# EAGLE board SparkFun_XBee_Serial_Explorer_Panel_v14 (EAGLE 7.5.0), part 1 of 2
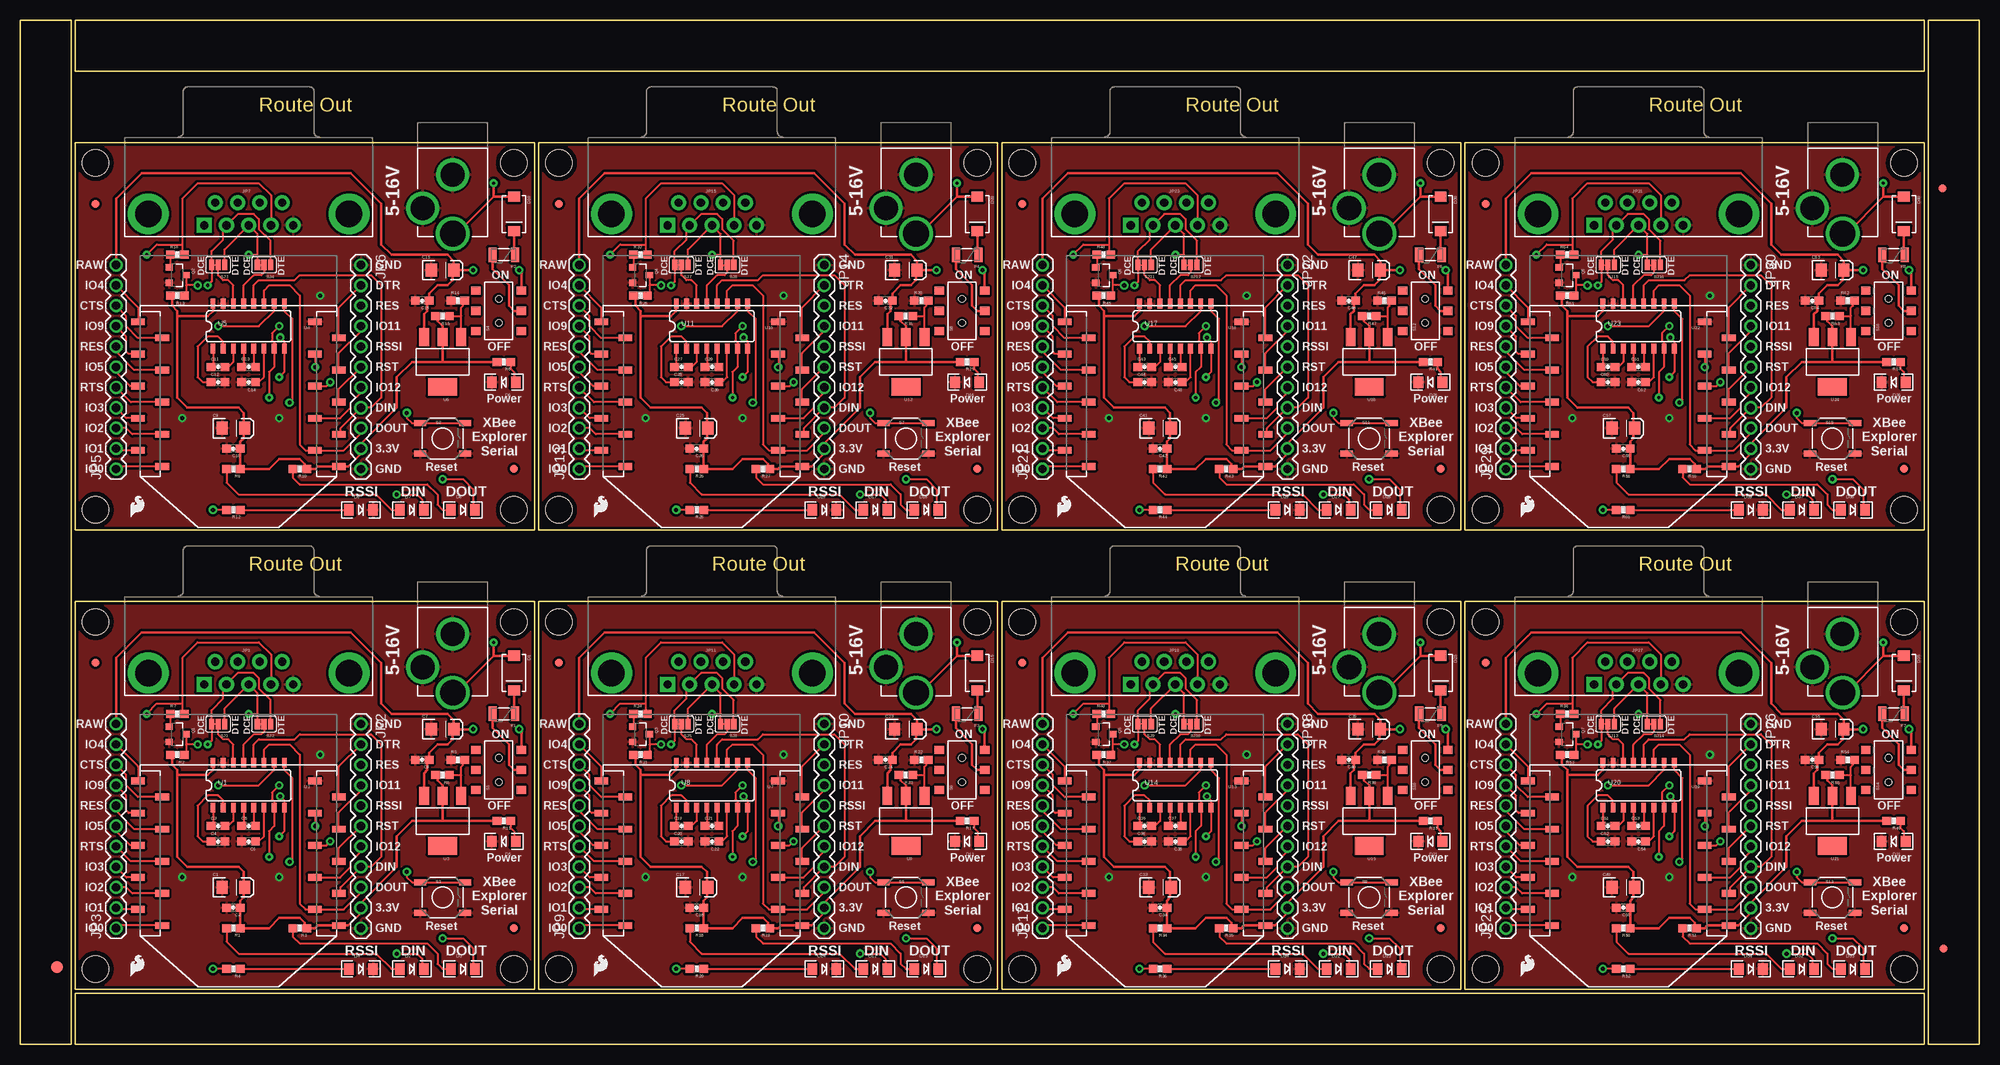
[diagram p0: board, top side]
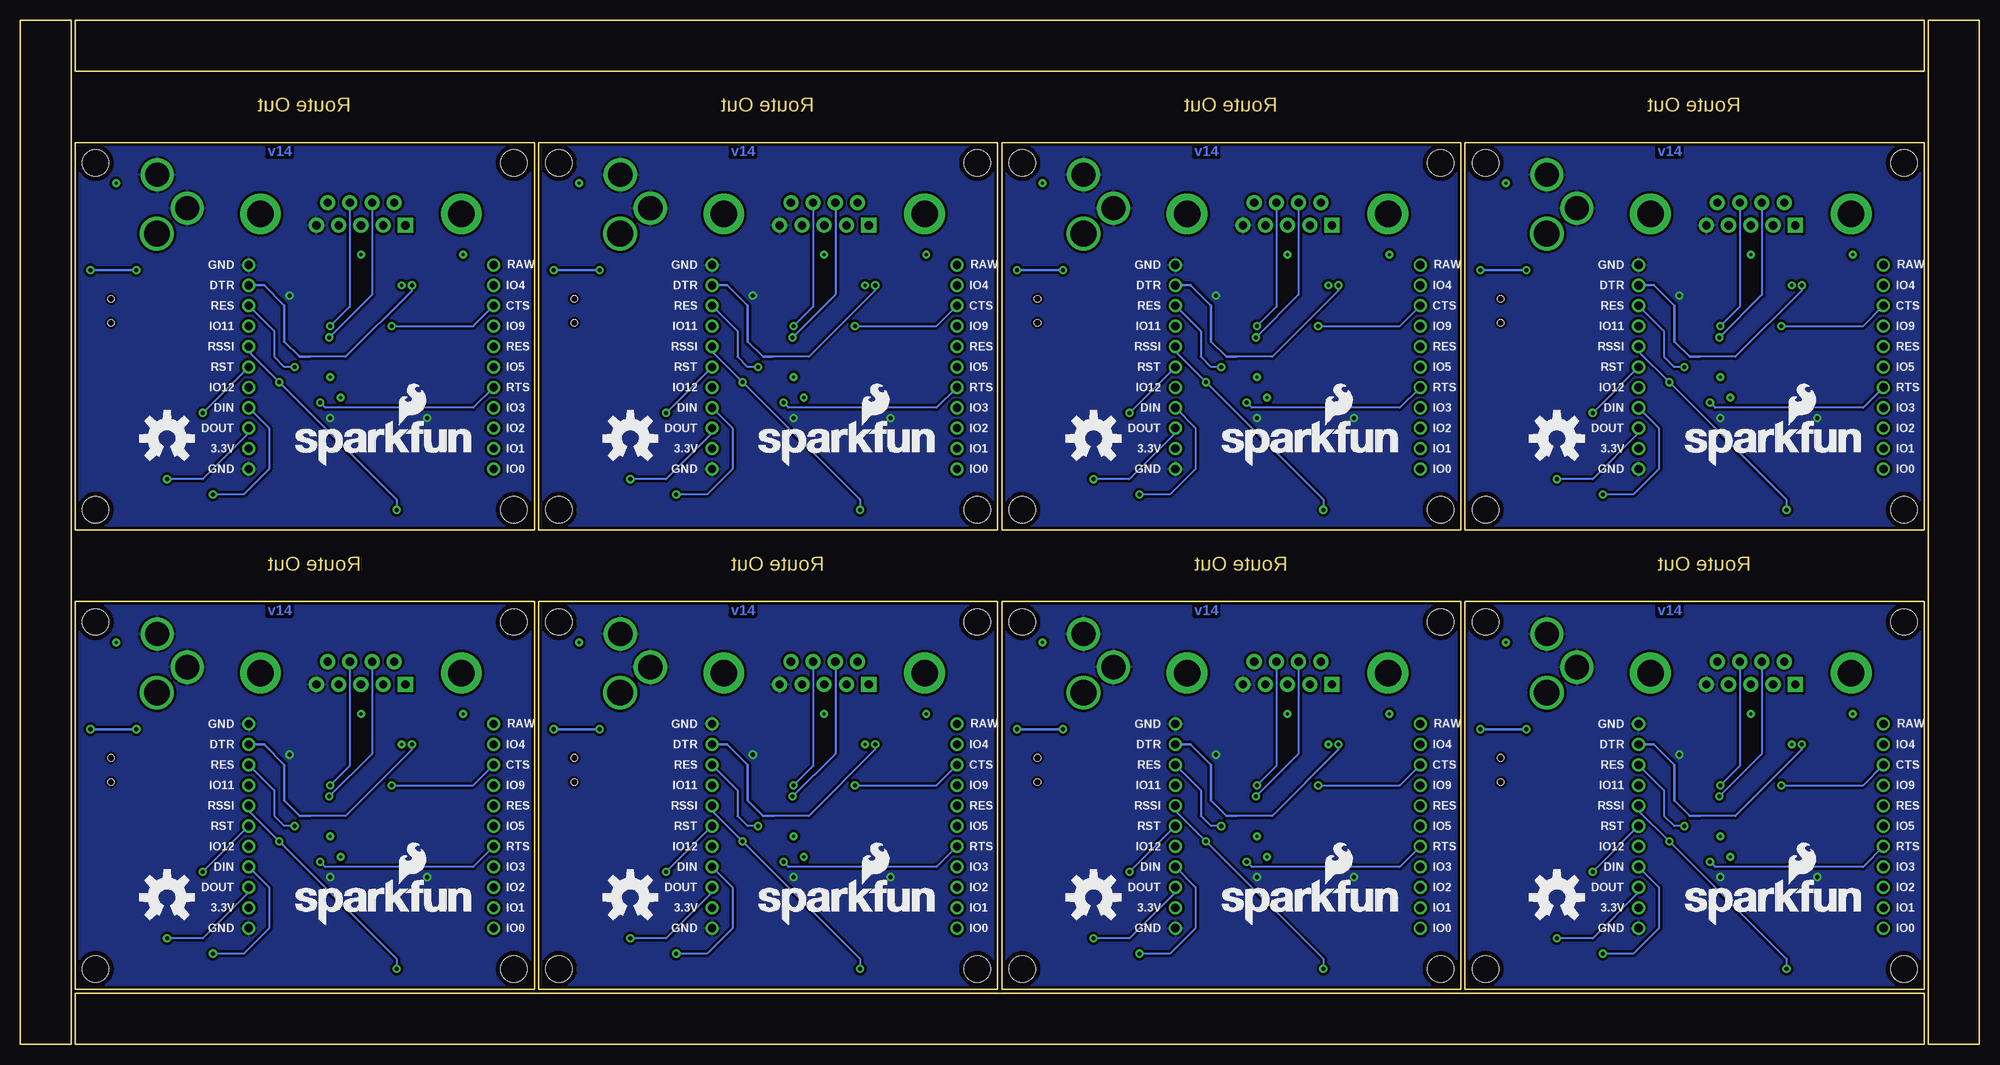
[diagram p1: board, bottom side, seen from below]

Size 243.84 x 127.51 mm. Coordinates in mm from the lower left corner, seen from the top.
Outline: 6.35,79.25 6.35,0 0,0 0,29.72
Outline: 0,27.18 0,127.51 6.35,127.51 6.35,76.71
Outline: 79.25,0 6.86,0 6.86,6.35 29.72,6.35
Outline: 27.18,6.35 236.98,6.35 236.98,0 76.71,0
Outline: 243.84,79.25 243.84,0 237.49,0 237.49,29.72
Outline: 237.49,27.18 237.49,127.51 243.84,127.51 243.84,76.71
Outline: 164.34,127.51 236.98,127.51 236.98,121.16 213.87,121.16
Outline: 216.41,121.16 6.86,121.16 6.86,127.51 166.88,127.51
Outline: 6.86,55.12 6.86,6.86 64.01,6.86 64.01,55.12 6.86,55.12
Outline: 6.86,112.27 6.86,64.01 64.01,64.01 64.01,112.27 6.86,112.27
Outline: 64.52,55.12 64.52,6.86 121.67,6.86 121.67,55.12 64.52,55.12
Outline: 64.52,112.27 64.52,64.01 121.67,64.01 121.67,112.27 64.52,112.27
Outline: 122.17,55.12 122.17,6.86 179.32,6.86 179.32,55.12 122.17,55.12
Outline: 122.17,112.27 122.17,64.01 179.32,64.01 179.32,112.27 122.17,112.27
Outline: 179.83,55.12 179.83,6.86 236.98,6.86 236.98,55.12 179.83,55.12
Outline: 179.83,112.27 179.83,64.01 236.98,64.01 236.98,112.27 179.83,112.27
Copper layers (1*16): Top 0.035mm / dielectric 1.5mm / Bottom 0.035mm
Design rules "SparkFun-2-layer": minimum track width 7mil, minimum drill 15mil, track to track 8mil, track to pad 8mil, pad to pad 8mil, via to via 8mil, smd to smd 8mil, copper to edge 8mil, drill to drill 8mil, minimum pad ring 12mil, minimum via ring 10mil, stop-mask expansion 4mil, vias tented up to drill 20mil, thermal gap 10mil
Net classes: 0 default: width 0.203 mm; 1 vcc: width 0.305 mm; 2 gnd: width 0.254 mm

## Footprints (pad centres in the part's own frame; a part is rotated, then mirrored left to right if it is on the bottom)
EIA3216 = smd 1.4 x 1.6: A 1.4,0; C -1.4,0
0603-CAP = smd 1.1 x 1: 1 -0.85,0; 2 0.85,0
SMA-DIODE = smd 1.27 x 1.47: A -2.15,0; C 2.15,0
LED-1206 = smd 1.2 x 1.4: A -1.5,0; C 1.5,0
FIDUCIAL-1.5X3 = smd 1.5 x 1.5: 1 0,0
FIDUCIAL-1X2 = smd 1 x 1: 1 0,0
PTC-1206 = smd 1 x 1.8: 1 -1.4,0; 2 1.4,0
DB9 = drill 1.016 pad 1.88 square: 1 -5.54,-1.42 | drill 1.016 pad 1.88: 2 -2.77,-1.42; 3 0,-1.42; 4 2.77,-1.42; 5 5.54,-1.42; 6 -4.15,1.42; 7 -1.38,1.42; 8 1.38,1.42; 9 4.15,1.42 | drill 3.302 pad 5.08: G1 -12.5,0; G2 12.5,0
1X11 = drill 1.016: 1 0,0; 2 2.54,0; 3 5.08,0; 4 7.62,0; 5 10.16,0; 6 12.7,0; 7 15.24,0; 8 17.78,0; 9 20.32,0; 10 22.86,0; 11 25.4,0
POWER_JACK_PTH_LOCK = drill 2.997 pad 4.115: GND 0.025,6.557; GNDBREAK 3.762,10.7 | drill 3.2 pad 4.115: PWR 0,13.878
SOT23-3 = smd 0.8 x 0.9: 1 -0.95,-1; 2 0.95,-1; 3 0,1.1
0603-RES = smd 1.1 x 1: 1 -0.85,0; 2 0.85,0
AYZ0202 = smd 1 x 1.15: 1 -2.5,2.825; 2 0,2.825; 3 2.5,2.825; 4 -2.5,-2.825; 5 0,-2.825; 6 2.5,-2.825 | hole 0.85: 1.5,0; -1.5,0
TACTILE-SWITCH-SMD = smd 1.524 x 0.762: 1 -2.794,1.905; 2 2.794,1.905; 3 -2.794,-1.905; 4 2.794,-1.905
PAD-JUMPER-3-2OF3_NC_BY_TRACE_YES_SILK_FULL_BOX = smd 0.635 x 1.27: 1 -0.813,0; 2 0,0; 3 0.813,0
TP_15TH = drill 0.381 pad 0.61: P$1 0,0
SO016 = smd 0.6 x 1.2: 1 -4.445,-2.8; 2 -3.175,-2.8; 3 -1.905,-2.8; 4 -0.635,-2.8; 5 0.635,-2.8; 6 1.905,-2.8; 7 3.175,-2.8; 8 4.445,-2.8; 9 4.445,2.8; 10 3.175,2.8; 11 1.905,2.8; 12 0.635,2.8; 13 -0.635,2.8; 14 -1.905,2.8; 15 -3.175,2.8; 16 -4.445,2.8
XBEE-SMD = smd 1.7 x 0.85: 1 -12.5,20; 2 -9.5,18; 3 -12.5,16; 4 -9.5,14; 5 -12.5,12; 6 -9.5,10; 7 -12.5,8; 8 -9.5,6; 9 -12.5,4; 10 -9.5,2; 11 12.5,2; 12 9.5,4; 13 12.5,6; 14 9.5,8; 15 12.5,10; 16 9.5,12; 17 12.5,14; 18 9.5,16; 19 12.5,18; 20 9.5,20
SOT223 = smd 1.219 x 2.235: 1 -2.311,-3.099; 2 0,-3.099; 3 2.311,-3.099 | smd 3.6 x 2.2: 4 0,3.099
STAND-OFF = hole 3.302: 0,0

## Placement (x,y rotation side)
C1  10uF  [EIA3216]  26.54,19.56 0 top
C2  0.1uF  [0603-CAP]  26.54,17.02 180 top
C3  0.1uF  [0603-CAP]  24.64,27.18 0 top
C4  0.1uF  [0603-CAP]  24.64,25.27 0 top
C5  0.1uF  [0603-CAP]  28.45,27.18 0 top
C6  0.1uF  [0603-CAP]  28.45,25.27 180 top
C7  10uF  [EIA3216]  52.58,39.24 0 top
C8  0.1uF  [0603-CAP]  50.04,35.43 180 top
C9  10uF  [EIA3216]  26.54,76.71 0 top
C10  0.1uF  [0603-CAP]  26.54,74.17 180 top
C11  0.1uF  [0603-CAP]  24.64,84.33 0 top
C12  0.1uF  [0603-CAP]  24.64,82.42 0 top
C13  0.1uF  [0603-CAP]  28.45,84.33 0 top
C14  0.1uF  [0603-CAP]  28.45,82.42 180 top
C15  10uF  [EIA3216]  52.58,96.39 0 top
C16  0.1uF  [0603-CAP]  50.04,92.58 180 top
C17  10uF  [EIA3216]  84.2,19.56 0 top
C18  0.1uF  [0603-CAP]  84.2,17.02 180 top
C19  0.1uF  [0603-CAP]  82.3,27.18 0 top
C20  0.1uF  [0603-CAP]  82.3,25.27 0 top
C21  0.1uF  [0603-CAP]  86.11,27.18 0 top
C22  0.1uF  [0603-CAP]  86.11,25.27 180 top
C23  10uF  [EIA3216]  110.24,39.24 0 top
C24  0.1uF  [0603-CAP]  107.7,35.43 180 top
C25  10uF  [EIA3216]  84.2,76.71 0 top
C26  0.1uF  [0603-CAP]  84.2,74.17 180 top
C27  0.1uF  [0603-CAP]  82.3,84.33 0 top
C28  0.1uF  [0603-CAP]  82.3,82.42 0 top
C29  0.1uF  [0603-CAP]  86.11,84.33 0 top
C30  0.1uF  [0603-CAP]  86.11,82.42 180 top
C31  10uF  [EIA3216]  110.24,96.39 0 top
C32  0.1uF  [0603-CAP]  107.7,92.58 180 top
C33  10uF  [EIA3216]  141.86,19.56 0 top
C34  0.1uF  [0603-CAP]  141.86,17.02 180 top
C35  0.1uF  [0603-CAP]  139.95,27.18 0 top
C36  0.1uF  [0603-CAP]  139.95,25.27 0 top
C37  0.1uF  [0603-CAP]  143.76,27.18 0 top
C38  0.1uF  [0603-CAP]  143.76,25.27 180 top
C39  10uF  [EIA3216]  167.89,39.24 0 top
C40  0.1uF  [0603-CAP]  165.35,35.43 180 top
C41  10uF  [EIA3216]  141.86,76.71 0 top
C42  0.1uF  [0603-CAP]  141.86,74.17 180 top
C43  0.1uF  [0603-CAP]  139.95,84.33 0 top
C44  0.1uF  [0603-CAP]  139.95,82.42 0 top
C45  0.1uF  [0603-CAP]  143.76,84.33 0 top
C46  0.1uF  [0603-CAP]  143.76,82.42 180 top
C47  10uF  [EIA3216]  167.89,96.39 0 top
C48  0.1uF  [0603-CAP]  165.35,92.58 180 top
C49  10uF  [EIA3216]  199.52,19.56 0 top
C50  0.1uF  [0603-CAP]  199.52,17.02 180 top
C51  0.1uF  [0603-CAP]  197.61,27.18 0 top
C52  0.1uF  [0603-CAP]  197.61,25.27 0 top
C53  0.1uF  [0603-CAP]  201.42,27.18 0 top
C54  0.1uF  [0603-CAP]  201.42,25.27 180 top
C55  10uF  [EIA3216]  225.55,39.24 0 top
C56  0.1uF  [0603-CAP]  223.01,35.43 180 top
C57  10uF  [EIA3216]  199.52,76.71 0 top
C58  0.1uF  [0603-CAP]  199.52,74.17 180 top
C59  0.1uF  [0603-CAP]  197.61,84.33 0 top
C60  0.1uF  [0603-CAP]  197.61,82.42 0 top
C61  0.1uF  [0603-CAP]  201.42,84.33 0 top
C62  0.1uF  [0603-CAP]  201.42,82.42 180 top
C63  10uF  [EIA3216]  225.55,96.39 0 top
C64  0.1uF  [0603-CAP]  223.01,92.58 180 top
D1  MBRA140  [SMA-DIODE]  61.47,46.23 270 top
D2  YELLOW  [LED-1206]  48.77,9.4 0 top
D3  GREEN  [LED-1206]  55.12,9.4 0 top
D4  GREEN  [LED-1206]  42.42,9.4 0 top
D5  RED  [LED-1206]  60.2,25.27 180 top
D6  RED  [LED-1206]  60.2,82.42 180 top
D7  YELLOW  [LED-1206]  48.77,66.55 0 top
D8  GREEN  [LED-1206]  55.12,66.55 0 top
D9  GREEN  [LED-1206]  42.42,66.55 0 top
D10  MBRA140  [SMA-DIODE]  61.47,103.38 270 top
D11  RED  [LED-1206]  117.86,25.27 180 top
D12  YELLOW  [LED-1206]  106.43,9.4 0 top
D13  GREEN  [LED-1206]  112.78,9.4 0 top
D14  GREEN  [LED-1206]  100.08,9.4 0 top
D15  MBRA140  [SMA-DIODE]  119.13,46.23 270 top
D16  RED  [LED-1206]  117.86,82.42 180 top
D17  YELLOW  [LED-1206]  106.43,66.55 0 top
D18  GREEN  [LED-1206]  112.78,66.55 0 top
D19  GREEN  [LED-1206]  100.08,66.55 0 top
D20  MBRA140  [SMA-DIODE]  119.13,103.38 270 top
D21  RED  [LED-1206]  175.51,25.27 180 top
D22  YELLOW  [LED-1206]  164.08,9.4 0 top
D23  GREEN  [LED-1206]  170.43,9.4 0 top
D24  GREEN  [LED-1206]  157.73,9.4 0 top
D25  MBRA140  [SMA-DIODE]  176.78,46.23 270 top
D26  RED  [LED-1206]  175.51,82.42 180 top
D27  YELLOW  [LED-1206]  164.08,66.55 0 top
D28  GREEN  [LED-1206]  170.43,66.55 0 top
D29  GREEN  [LED-1206]  157.73,66.55 0 top
D30  MBRA140  [SMA-DIODE]  176.78,103.38 270 top
D31  RED  [LED-1206]  233.17,25.27 180 top
D32  YELLOW  [LED-1206]  221.74,9.4 0 top
D33  GREEN  [LED-1206]  228.09,9.4 0 top
D34  GREEN  [LED-1206]  215.39,9.4 0 top
D35  MBRA140  [SMA-DIODE]  234.44,46.23 270 top
D36  RED  [LED-1206]  233.17,82.42 180 top
D37  YELLOW  [LED-1206]  221.74,66.55 0 top
D38  GREEN  [LED-1206]  228.09,66.55 0 top
D39  GREEN  [LED-1206]  215.39,66.55 0 top
D40  MBRA140  [SMA-DIODE]  234.44,103.38 270 top
E$1  [FIDUCIAL-1.5X3]  4.57,9.65 0 top
E$5  [FIDUCIAL-1X2]  239.4,11.94 0 top
E$6  [FIDUCIAL-1X2]  239.27,106.55 180 top
F1  PTCTHERMISTOR1206  [PTC-1206]  60.2,41.15 180 top
F2  PTCTHERMISTOR1206  [PTC-1206]  60.2,98.3 180 top
F3  PTCTHERMISTOR1206  [PTC-1206]  117.86,41.15 180 top
F4  PTCTHERMISTOR1206  [PTC-1206]  117.86,98.3 180 top
F5  PTCTHERMISTOR1206  [PTC-1206]  175.51,41.15 180 top
F6  PTCTHERMISTOR1206  [PTC-1206]  175.51,98.3 180 top
F7  PTCTHERMISTOR1206  [PTC-1206]  233.17,41.15 180 top
F8  PTCTHERMISTOR1206  [PTC-1206]  233.17,98.3 180 top
JP1  RS232  [DB9]  28.45,46.23 0 top
JP2  [1X11]  42.42,39.88 270 top
JP3  [1X11]  11.94,14.48 90 top
JP4  POWER_JACKPTH_LOCK  [POWER_JACK_PTH_LOCK]  53.85,57.66 180 top
JP5  [1X11]  11.94,71.63 90 top
JP6  [1X11]  42.42,97.03 270 top
JP7  RS232  [DB9]  28.45,103.38 0 top
JP8  POWER_JACKPTH_LOCK  [POWER_JACK_PTH_LOCK]  53.85,114.81 180 top
JP9  [1X11]  69.6,14.48 90 top
JP10  [1X11]  100.08,39.88 270 top
JP11  RS232  [DB9]  86.11,46.23 0 top
JP12  POWER_JACKPTH_LOCK  [POWER_JACK_PTH_LOCK]  111.51,57.66 180 top
JP13  [1X11]  69.6,71.63 90 top
JP14  [1X11]  100.08,97.03 270 top
JP15  RS232  [DB9]  86.11,103.38 0 top
JP16  POWER_JACKPTH_LOCK  [POWER_JACK_PTH_LOCK]  111.51,114.81 180 top
JP17  [1X11]  127.25,14.48 90 top
JP18  [1X11]  157.73,39.88 270 top
JP19  RS232  [DB9]  143.76,46.23 0 top
JP20  POWER_JACKPTH_LOCK  [POWER_JACK_PTH_LOCK]  169.16,57.66 180 top
JP21  [1X11]  127.25,71.63 90 top
JP22  [1X11]  157.73,97.03 270 top
JP23  RS232  [DB9]  143.76,103.38 0 top
JP24  POWER_JACKPTH_LOCK  [POWER_JACK_PTH_LOCK]  169.16,114.81 180 top
JP25  [1X11]  184.91,14.48 90 top
JP26  [1X11]  215.39,39.88 270 top
JP27  RS232  [DB9]  201.42,46.23 0 top
JP28  POWER_JACKPTH_LOCK  [POWER_JACK_PTH_LOCK]  226.82,57.66 180 top
JP29  [1X11]  184.91,71.63 90 top
JP30  [1X11]  215.39,97.03 270 top
JP31  RS232  [DB9]  201.42,103.38 0 top
JP32  POWER_JACKPTH_LOCK  [POWER_JACK_PTH_LOCK]  226.82,114.81 180 top
LOGO1  OSHW-LOGOL  [OSHW-LOGO-L]  52.58,18.29 0 bottom
LOGO2  SFE_LOGO_NAME_FLAME.2_INCH  [SFE_LOGO_NAME_FLAME_.2]  37.29,14.78 0 bottom
LOGO3  SFE_LOGO_FLAME.1_INCH  [SFE_LOGO_FLAME_.1]  13.46,8.18 0 top
LOGO4  OSHW-LOGOL  [OSHW-LOGO-L]  52.58,75.44 0 bottom
LOGO5  SFE_LOGO_NAME_FLAME.2_INCH  [SFE_LOGO_NAME_FLAME_.2]  37.29,71.93 0 bottom
LOGO6  SFE_LOGO_FLAME.1_INCH  [SFE_LOGO_FLAME_.1]  13.46,65.33 0 top
LOGO7  OSHW-LOGOL  [OSHW-LOGO-L]  110.24,18.29 0 bottom
LOGO8  SFE_LOGO_NAME_FLAME.2_INCH  [SFE_LOGO_NAME_FLAME_.2]  94.95,14.78 0 bottom
LOGO9  SFE_LOGO_FLAME.1_INCH  [SFE_LOGO_FLAME_.1]  71.12,8.18 0 top
LOGO10  OSHW-LOGOL  [OSHW-LOGO-L]  110.24,75.44 0 bottom
LOGO11  SFE_LOGO_NAME_FLAME.2_INCH  [SFE_LOGO_NAME_FLAME_.2]  94.95,71.93 0 bottom
LOGO12  SFE_LOGO_FLAME.1_INCH  [SFE_LOGO_FLAME_.1]  71.12,65.33 0 top
LOGO13  OSHW-LOGOL  [OSHW-LOGO-L]  167.89,18.29 0 bottom
LOGO14  SFE_LOGO_NAME_FLAME.2_INCH  [SFE_LOGO_NAME_FLAME_.2]  152.6,14.78 0 bottom
LOGO15  SFE_LOGO_FLAME.1_INCH  [SFE_LOGO_FLAME_.1]  128.78,8.18 0 top
LOGO16  OSHW-LOGOL  [OSHW-LOGO-L]  167.89,75.44 0 bottom
LOGO17  SFE_LOGO_NAME_FLAME.2_INCH  [SFE_LOGO_NAME_FLAME_.2]  152.6,71.93 0 bottom
LOGO18  SFE_LOGO_FLAME.1_INCH  [SFE_LOGO_FLAME_.1]  128.78,65.33 0 top
LOGO19  OSHW-LOGOL  [OSHW-LOGO-L]  225.55,18.29 0 bottom
LOGO20  SFE_LOGO_NAME_FLAME.2_INCH  [SFE_LOGO_NAME_FLAME_.2]  210.26,14.78 0 bottom
LOGO21  SFE_LOGO_FLAME.1_INCH  [SFE_LOGO_FLAME_.1]  186.44,8.18 0 top
LOGO22  OSHW-LOGOL  [OSHW-LOGO-L]  225.55,75.44 0 bottom
LOGO23  SFE_LOGO_NAME_FLAME.2_INCH  [SFE_LOGO_NAME_FLAME_.2]  210.26,71.93 0 bottom
LOGO24  SFE_LOGO_FLAME.1_INCH  [SFE_LOGO_FLAME_.1]  186.44,65.33 0 top
Q1  MBT2222  [SOT23-3]  19.56,38.61 270 top
Q2  MBT2222  [SOT23-3]  19.56,95.76 270 top
Q3  MBT2222  [SOT23-3]  77.22,38.61 270 top
Q4  MBT2222  [SOT23-3]  77.22,95.76 270 top
Q5  MBT2222  [SOT23-3]  134.87,38.61 270 top
Q6  MBT2222  [SOT23-3]  134.87,95.76 270 top
Q7  MBT2222  [SOT23-3]  192.53,38.61 270 top
Q8  MBT2222  [SOT23-3]  192.53,95.76 270 top
R1  1K  [0603-RES]  26.54,14.48 180 top
R2  10K  [0603-RES]  19.56,36.07 180 top
R3  1K  [0603-RES]  34.8,14.48 180 top
R4  1K  [0603-RES]  26.54,9.4 180 top
R5  390  [0603-RES]  54.48,35.43 0 top
R6  240  [0603-RES]  52.58,33.53 180 top
R7  1K  [0603-RES]  19.56,41.15 0 top
R8  1K  [0603-RES]  60.2,84.96 180 top
R9  1K  [0603-RES]  26.54,71.63 180 top
R10  1K  [0603-RES]  34.8,71.63 180 top
R11  1K  [0603-RES]  60.2,27.81 180 top
R12  1K  [0603-RES]  26.54,66.55 180 top
R13  10K  [0603-RES]  19.56,93.22 180 top
R14  390  [0603-RES]  54.48,92.58 0 top
R15  240  [0603-RES]  52.58,90.68 180 top
R16  1K  [0603-RES]  19.56,98.3 0 top
R17  1K  [0603-RES]  117.86,27.81 180 top
R18  1K  [0603-RES]  84.2,14.48 180 top
R19  1K  [0603-RES]  92.46,14.48 180 top
R20  1K  [0603-RES]  84.2,9.4 180 top
R21  10K  [0603-RES]  77.22,36.07 180 top
R22  390  [0603-RES]  112.14,35.43 0 top
R23  240  [0603-RES]  110.24,33.53 180 top
R24  1K  [0603-RES]  77.22,41.15 0 top
R25  1K  [0603-RES]  117.86,84.96 180 top
R26  1K  [0603-RES]  84.2,71.63 180 top
R27  1K  [0603-RES]  92.46,71.63 180 top
R28  1K  [0603-RES]  84.2,66.55 180 top
R29  10K  [0603-RES]  77.22,93.22 180 top
R30  390  [0603-RES]  112.14,92.58 0 top
R31  240  [0603-RES]  110.24,90.68 180 top
R32  1K  [0603-RES]  77.22,98.3 0 top
R33  1K  [0603-RES]  175.51,27.81 180 top
R34  1K  [0603-RES]  141.86,14.48 180 top
R35  1K  [0603-RES]  150.11,14.48 180 top
R36  1K  [0603-RES]  141.86,9.4 180 top
R37  10K  [0603-RES]  134.87,36.07 180 top
R38  390  [0603-RES]  169.8,35.43 0 top
R39  240  [0603-RES]  167.89,33.53 180 top
R40  1K  [0603-RES]  134.87,41.15 0 top
R41  1K  [0603-RES]  175.51,84.96 180 top
R42  1K  [0603-RES]  141.86,71.63 180 top
R43  1K  [0603-RES]  150.11,71.63 180 top
R44  1K  [0603-RES]  141.86,66.55 180 top
R45  10K  [0603-RES]  134.87,93.22 180 top
R46  390  [0603-RES]  169.8,92.58 0 top
R47  240  [0603-RES]  167.89,90.68 180 top
R48  1K  [0603-RES]  134.87,98.3 0 top
R49  1K  [0603-RES]  233.17,27.81 180 top
R50  1K  [0603-RES]  199.52,14.48 180 top
R51  1K  [0603-RES]  207.77,14.48 180 top
R52  1K  [0603-RES]  199.52,9.4 180 top
R53  10K  [0603-RES]  192.53,36.07 180 top
R54  390  [0603-RES]  227.46,35.43 0 top
R55  240  [0603-RES]  225.55,33.53 180 top
R56  1K  [0603-RES]  192.53,41.15 0 top
R57  1K  [0603-RES]  233.17,84.96 180 top
R58  1K  [0603-RES]  199.52,71.63 180 top
R59  1K  [0603-RES]  207.77,71.63 180 top
R60  1K  [0603-RES]  199.52,66.55 180 top
R61  10K  [0603-RES]  192.53,93.22 180 top
R62  390  [0603-RES]  227.46,92.58 0 top
R63  240  [0603-RES]  225.55,90.68 180 top
R64  1K  [0603-RES]  192.53,98.3 0 top
S1  AYZ0202  [AYZ0202]  59.56,34.16 90 top
S2  TAC_SWITCHSMD  [TACTILE-SWITCH-SMD]  52.58,75.44 0 top
S3  TAC_SWITCHSMD  [TACTILE-SWITCH-SMD]  52.58,18.29 0 top
S4  AYZ0202  [AYZ0202]  59.56,91.31 90 top
S5  TAC_SWITCHSMD  [TACTILE-SWITCH-SMD]  110.24,18.29 0 top
S6  AYZ0202  [AYZ0202]  117.22,34.16 90 top
S7  TAC_SWITCHSMD  [TACTILE-SWITCH-SMD]  110.24,75.44 0 top
S8  AYZ0202  [AYZ0202]  117.22,91.31 90 top
S9  TAC_SWITCHSMD  [TACTILE-SWITCH-SMD]  167.89,18.29 0 top
S10  AYZ0202  [AYZ0202]  174.88,34.16 90 top
S11  TAC_SWITCHSMD  [TACTILE-SWITCH-SMD]  167.89,75.44 0 top
S12  AYZ0202  [AYZ0202]  174.88,91.31 90 top
S13  TAC_SWITCHSMD  [TACTILE-SWITCH-SMD]  225.55,18.29 0 top
S14  AYZ0202  [AYZ0202]  232.54,34.16 90 top
S15  TAC_SWITCHSMD  [TACTILE-SWITCH-SMD]  225.55,75.44 0 top
S16  AYZ0202  [AYZ0202]  232.54,91.31 90 top
SJ1  JUMPER-PAD-3-2OF3_NC_BY_TRACE_SMALL  [PAD-JUMPER-3-2OF3_NC_BY_TRACE_YES_SILK_FULL_BOX]  24.64,39.88 180 top
SJ2  JUMPER-PAD-3-2OF3_NC_BY_TRACE_SMALL  [PAD-JUMPER-3-2OF3_NC_BY_TRACE_YES_SILK_FULL_BOX]  30.35,39.88 180 top
SJ3  JUMPER-PAD-3-2OF3_NC_BY_TRACE_SMALL  [PAD-JUMPER-3-2OF3_NC_BY_TRACE_YES_SILK_FULL_BOX]  24.64,97.03 180 top
SJ4  JUMPER-PAD-3-2OF3_NC_BY_TRACE_SMALL  [PAD-JUMPER-3-2OF3_NC_BY_TRACE_YES_SILK_FULL_BOX]  30.35,97.03 180 top
SJ5  JUMPER-PAD-3-2OF3_NC_BY_TRACE_SMALL  [PAD-JUMPER-3-2OF3_NC_BY_TRACE_YES_SILK_FULL_BOX]  82.3,39.88 180 top
SJ6  JUMPER-PAD-3-2OF3_NC_BY_TRACE_SMALL  [PAD-JUMPER-3-2OF3_NC_BY_TRACE_YES_SILK_FULL_BOX]  88.01,39.88 180 top
SJ7  JUMPER-PAD-3-2OF3_NC_BY_TRACE_SMALL  [PAD-JUMPER-3-2OF3_NC_BY_TRACE_YES_SILK_FULL_BOX]  82.3,97.03 180 top
SJ8  JUMPER-PAD-3-2OF3_NC_BY_TRACE_SMALL  [PAD-JUMPER-3-2OF3_NC_BY_TRACE_YES_SILK_FULL_BOX]  88.01,97.03 180 top
SJ9  JUMPER-PAD-3-2OF3_NC_BY_TRACE_SMALL  [PAD-JUMPER-3-2OF3_NC_BY_TRACE_YES_SILK_FULL_BOX]  139.95,39.88 180 top
SJ10  JUMPER-PAD-3-2OF3_NC_BY_TRACE_SMALL  [PAD-JUMPER-3-2OF3_NC_BY_TRACE_YES_SILK_FULL_BOX]  145.67,39.88 180 top
SJ11  JUMPER-PAD-3-2OF3_NC_BY_TRACE_SMALL  [PAD-JUMPER-3-2OF3_NC_BY_TRACE_YES_SILK_FULL_BOX]  139.95,97.03 180 top
SJ12  JUMPER-PAD-3-2OF3_NC_BY_TRACE_SMALL  [PAD-JUMPER-3-2OF3_NC_BY_TRACE_YES_SILK_FULL_BOX]  145.67,97.03 180 top
SJ13  JUMPER-PAD-3-2OF3_NC_BY_TRACE_SMALL  [PAD-JUMPER-3-2OF3_NC_BY_TRACE_YES_SILK_FULL_BOX]  197.61,39.88 180 top
SJ14  JUMPER-PAD-3-2OF3_NC_BY_TRACE_SMALL  [PAD-JUMPER-3-2OF3_NC_BY_TRACE_YES_SILK_FULL_BOX]  203.33,39.88 180 top
SJ15  JUMPER-PAD-3-2OF3_NC_BY_TRACE_SMALL  [PAD-JUMPER-3-2OF3_NC_BY_TRACE_YES_SILK_FULL_BOX]  197.61,97.03 180 top
SJ16  JUMPER-PAD-3-2OF3_NC_BY_TRACE_SMALL  [PAD-JUMPER-3-2OF3_NC_BY_TRACE_YES_SILK_FULL_BOX]  203.33,97.03 180 top
TP1  TEST-POINTTP_15TH_THRU  [TP_15TH]  32.26,25.91 0 top
TP2  TEST-POINTTP_15TH_THRU  [TP_15TH]  30.99,23.37 0 top
TP3  TEST-POINTTP_15TH_THRU  [TP_15TH]  15.75,41.15 0 top
TP4  TEST-POINTTP_15TH_THRU  [TP_15TH]  28.45,41.15 0 top
TP5  TEST-POINTTP_15TH_THRU  [TP_15TH]  23.37,37.34 0 top
TP6  TEST-POINTTP_15TH_THRU  [TP_15TH]  58.93,50.04 0 top
TP7  TEST-POINTTP_15TH_THRU  [TP_15TH]  32.26,83.06 0 top
TP8  TEST-POINTTP_15TH_THRU  [TP_15TH]  30.99,80.52 0 top
TP9  TEST-POINTTP_15TH_THRU  [TP_15TH]  15.75,98.3 0 top
TP10  TEST-POINTTP_15TH_THRU  [TP_15TH]  28.45,98.3 0 top
TP11  TEST-POINTTP_15TH_THRU  [TP_15TH]  23.37,94.49 0 top
TP12  TEST-POINTTP_15TH_THRU  [TP_15TH]  58.93,107.19 0 top
TP13  TEST-POINTTP_15TH_THRU  [TP_15TH]  89.92,25.91 0 top
TP14  TEST-POINTTP_15TH_THRU  [TP_15TH]  88.65,23.37 0 top
TP15  TEST-POINTTP_15TH_THRU  [TP_15TH]  73.41,41.15 0 top
TP16  TEST-POINTTP_15TH_THRU  [TP_15TH]  86.11,41.15 0 top
TP17  TEST-POINTTP_15TH_THRU  [TP_15TH]  81.03,37.34 0 top
TP18  TEST-POINTTP_15TH_THRU  [TP_15TH]  116.59,50.04 0 top
TP19  TEST-POINTTP_15TH_THRU  [TP_15TH]  89.92,83.06 0 top
TP20  TEST-POINTTP_15TH_THRU  [TP_15TH]  88.65,80.52 0 top
TP21  TEST-POINTTP_15TH_THRU  [TP_15TH]  73.41,98.3 0 top
TP22  TEST-POINTTP_15TH_THRU  [TP_15TH]  86.11,98.3 0 top
TP23  TEST-POINTTP_15TH_THRU  [TP_15TH]  81.03,94.49 0 top
TP24  TEST-POINTTP_15TH_THRU  [TP_15TH]  116.59,107.19 0 top
TP25  TEST-POINTTP_15TH_THRU  [TP_15TH]  147.57,25.91 0 top
TP26  TEST-POINTTP_15TH_THRU  [TP_15TH]  146.3,23.37 0 top
TP27  TEST-POINTTP_15TH_THRU  [TP_15TH]  131.06,41.15 0 top
TP28  TEST-POINTTP_15TH_THRU  [TP_15TH]  143.76,41.15 0 top
TP29  TEST-POINTTP_15TH_THRU  [TP_15TH]  138.68,37.34 0 top
TP30  TEST-POINTTP_15TH_THRU  [TP_15TH]  174.24,50.04 0 top
TP31  TEST-POINTTP_15TH_THRU  [TP_15TH]  147.57,83.06 0 top
TP32  TEST-POINTTP_15TH_THRU  [TP_15TH]  146.3,80.52 0 top
TP33  TEST-POINTTP_15TH_THRU  [TP_15TH]  131.06,98.3 0 top
TP34  TEST-POINTTP_15TH_THRU  [TP_15TH]  143.76,98.3 0 top
TP35  TEST-POINTTP_15TH_THRU  [TP_15TH]  138.68,94.49 0 top
TP36  TEST-POINTTP_15TH_THRU  [TP_15TH]  174.24,107.19 0 top
TP37  TEST-POINTTP_15TH_THRU  [TP_15TH]  205.23,25.91 0 top
TP38  TEST-POINTTP_15TH_THRU  [TP_15TH]  203.96,23.37 0 top
TP39  TEST-POINTTP_15TH_THRU  [TP_15TH]  188.72,41.15 0 top
TP40  TEST-POINTTP_15TH_THRU  [TP_15TH]  201.42,41.15 0 top
TP41  TEST-POINTTP_15TH_THRU  [TP_15TH]  196.34,37.34 0 top
TP42  TEST-POINTTP_15TH_THRU  [TP_15TH]  231.9,50.04 0 top
TP43  TEST-POINTTP_15TH_THRU  [TP_15TH]  205.23,83.06 0 top
TP44  TEST-POINTTP_15TH_THRU  [TP_15TH]  203.96,80.52 0 top
TP45  TEST-POINTTP_15TH_THRU  [TP_15TH]  188.72,98.3 0 top
TP46  TEST-POINTTP_15TH_THRU  [TP_15TH]  201.42,98.3 0 top
TP47  TEST-POINTTP_15TH_THRU  [TP_15TH]  196.34,94.49 0 top
TP48  TEST-POINTTP_15TH_THRU  [TP_15TH]  231.9,107.19 0 top
U1  MAX232SOIC16  [SO016]  28.45,32.26 0 top
U2  XBEE-1B3  [XBEE-SMD]  27.18,34.8 180 top
U3  LM117  [SOT223]  52.58,27.81 180 top
U4  XBEE-1B3  [XBEE-SMD]  27.18,91.95 180 top
U5  MAX232SOIC16  [SO016]  28.45,89.41 0 top
U6  LM117  [SOT223]  52.58,84.96 180 top
U7  XBEE-1B3  [XBEE-SMD]  84.84,34.8 180 top
U8  MAX232SOIC16  [SO016]  86.11,32.26 0 top
U9  LM117  [SOT223]  110.24,27.81 180 top
U10  XBEE-1B3  [XBEE-SMD]  84.84,91.95 180 top
U11  MAX232SOIC16  [SO016]  86.11,89.41 0 top
U12  LM117  [SOT223]  110.24,84.96 180 top
U13  XBEE-1B3  [XBEE-SMD]  142.49,34.8 180 top
U14  MAX232SOIC16  [SO016]  143.76,32.26 0 top
U15  LM117  [SOT223]  167.89,27.81 180 top
U16  XBEE-1B3  [XBEE-SMD]  142.49,91.95 180 top
U17  MAX232SOIC16  [SO016]  143.76,89.41 0 top
U18  LM117  [SOT223]  167.89,84.96 180 top
U19  XBEE-1B3  [XBEE-SMD]  200.15,34.8 180 top
U20  MAX232SOIC16  [SO016]  201.42,32.26 0 top
U21  LM117  [SOT223]  225.55,27.81 180 top
U22  XBEE-1B3  [XBEE-SMD]  200.15,91.95 180 top
U23  MAX232SOIC16  [SO016]  201.42,89.41 0 top
U24  LM117  [SOT223]  225.55,84.96 180 top
U$1  FIDUCIAL1X2  [FIDUCIAL-1X2]  9.4,104.65 270 top
U$2  FIDUCIAL1X2  [FIDUCIAL-1X2]  61.47,71.63 270 top
U$3  STAND-OFF  [STAND-OFF]  9.4,66.55 270 top
U$4  STAND-OFF  [STAND-OFF]  61.47,66.55 270 top
U$5  STAND-OFF  [STAND-OFF]  9.4,9.4 270 top
U$6  STAND-OFF  [STAND-OFF]  61.47,109.73 270 top
U$7  FIDUCIAL1X2  [FIDUCIAL-1X2]  9.4,47.5 270 top
U$8  STAND-OFF  [STAND-OFF]  9.4,109.73 270 top
U$9  STAND-OFF  [STAND-OFF]  61.47,9.4 270 top
U$10  STAND-OFF  [STAND-OFF]  61.47,52.58 270 top
U$11  STAND-OFF  [STAND-OFF]  9.4,52.58 270 top
U$12  FIDUCIAL1X2  [FIDUCIAL-1X2]  67.06,47.5 270 top
U$13  FIDUCIAL1X2  [FIDUCIAL-1X2]  119.13,14.48 270 top
U$14  STAND-OFF  [STAND-OFF]  67.06,9.4 270 top
U$15  STAND-OFF  [STAND-OFF]  119.13,9.4 270 top
U$16  FIDUCIAL1X2  [FIDUCIAL-1X2]  61.47,14.48 270 top
U$17  STAND-OFF  [STAND-OFF]  119.13,52.58 270 top
U$18  STAND-OFF  [STAND-OFF]  67.06,52.58 270 top
U$19  FIDUCIAL1X2  [FIDUCIAL-1X2]  67.06,104.65 270 top
U$20  FIDUCIAL1X2  [FIDUCIAL-1X2]  119.13,71.63 270 top
U$21  STAND-OFF  [STAND-OFF]  67.06,66.55 270 top
U$22  STAND-OFF  [STAND-OFF]  119.13,66.55 270 top
U$23  STAND-OFF  [STAND-OFF]  119.13,109.73 270 top
U$24  STAND-OFF  [STAND-OFF]  67.06,109.73 270 top
U$25  FIDUCIAL1X2  [FIDUCIAL-1X2]  124.71,47.5 270 top
U$26  FIDUCIAL1X2  [FIDUCIAL-1X2]  176.78,14.48 270 top
U$27  STAND-OFF  [STAND-OFF]  124.71,9.4 270 top
U$28  STAND-OFF  [STAND-OFF]  176.78,9.4 270 top
U$29  STAND-OFF  [STAND-OFF]  176.78,52.58 270 top
U$30  STAND-OFF  [STAND-OFF]  124.71,52.58 270 top
U$31  FIDUCIAL1X2  [FIDUCIAL-1X2]  124.71,104.65 270 top
U$32  FIDUCIAL1X2  [FIDUCIAL-1X2]  176.78,71.63 270 top
U$33  STAND-OFF  [STAND-OFF]  124.71,66.55 270 top
U$34  STAND-OFF  [STAND-OFF]  176.78,66.55 270 top
U$35  STAND-OFF  [STAND-OFF]  176.78,109.73 270 top
U$36  STAND-OFF  [STAND-OFF]  124.71,109.73 270 top
U$37  FIDUCIAL1X2  [FIDUCIAL-1X2]  182.37,47.5 270 top
U$38  FIDUCIAL1X2  [FIDUCIAL-1X2]  234.44,14.48 270 top
U$39  STAND-OFF  [STAND-OFF]  182.37,9.4 270 top
U$40  STAND-OFF  [STAND-OFF]  234.44,9.4 270 top
U$41  STAND-OFF  [STAND-OFF]  234.44,52.58 270 top
U$42  STAND-OFF  [STAND-OFF]  182.37,52.58 270 top
U$43  FIDUCIAL1X2  [FIDUCIAL-1X2]  182.37,104.65 270 top
U$44  FIDUCIAL1X2  [FIDUCIAL-1X2]  234.44,71.63 270 top
U$45  STAND-OFF  [STAND-OFF]  182.37,66.55 270 top
U$46  STAND-OFF  [STAND-OFF]  234.44,66.55 270 top
U$47  STAND-OFF  [STAND-OFF]  234.44,109.73 270 top
U$48  STAND-OFF  [STAND-OFF]  182.37,109.73 270 top

## Library data of the parts
C1 C7 C9 C15 C17 C23 C25 C31 C33 C39 C41 C47 C49 C55 C57 C63 = SparkFun-Capacitors; PROD_ID: CAP-00811
C2-C6 C8 C10-C14 C16 C18-C22 C24 C26-C30 C32 C34-C38 C40 C42-C46 C48 C50-C54 C56 C58-C62 C64 = SparkFun-Capacitors; PROD_ID: CAP-00810
D1 D10 D15 D20 D25 D30 D35 D40 = SparkFun-DiscreteSemi; PROD_ID: DIO-08053
D2 D7 D12 D17 D22 D27 D32 D37 = SparkFun-LED; PROD_ID: DIO-00820
D3 D4 D8 D9 D13 D14 D18 D19 D23 D24 D28 D29 D33 D34 D38 D39 = SparkFun-LED; PROD_ID: DIO-00862
D5 D6 D11 D16 D21 D26 D31 D36 = SparkFun-LED; PROD_ID: DIO-00809
E$1 = SparkFun-Retired
E$5 E$6 LOGO1-LOGO24 U$1 U$2 U$7 U$12 U$13 U$16 U$19 U$20 U$25 U$26 U$31 U$32 U$37 U$38 U$43 U$44 = SparkFun-Aesthetics
F1-F8 = SparkFun-PowerIC; PROD_ID: RES-08585
JP1 JP7 JP11 JP15 JP19 JP23 JP27 JP31 = SparkFun-Connectors; PROD_ID: CONN-08194
JP2 JP3 JP5 JP6 JP9 JP10 JP13 JP14 JP17 JP18 JP21 JP22 JP25 JP26 JP29 JP30 = SparkFun
JP4 JP8 JP12 JP16 JP20 JP24 JP28 JP32 = SparkFun-Connectors; PROD_ID: CONN-08197; SF_ID: PRT-00119
Q1-Q8 = SparkFun-DiscreteSemi; PROD_ID: TRANS-08049
R1 R3 R4 R7-R12 R16-R20 R24-R28 R32-R36 R40-R44 R48-R52 R56-R60 R64 = SparkFun-Resistors; PROD_ID: RES-07856
R2 R13 R21 R29 R37 R45 R53 R61 = SparkFun-Resistors; PROD_ID: RES-00824
R5 R14 R22 R30 R38 R46 R54 R62 = SparkFun-Resistors; PROD_ID: RES-07864
R6 R15 R23 R31 R39 R47 R55 R63 = SparkFun-Resistors; PROD_ID: RES-07849
S1 S4 S6 S8 S10 S12 S14 S16 = SparkFun-Electromechanical; PROD_ID: SWCH-08179
S2 S3 S5 S7 S9 S11 S13 S15 = SparkFun-Electromechanical; PROD_ID: SWCH-08247
SJ1-SJ16 TP1-TP48 = SparkFun-Passives
U1 U5 U8 U11 U14 U17 U20 U23 = SparkFun-DigitalIC; PROD_ID: IC-08171
U2 U4 U7 U10 U13 U16 U19 U22 = SparkFun-RF; PROD_ID: CONN-09042
U3 U6 U9 U12 U15 U18 U21 U24 = SparkFun-PowerIC; PROD_ID: VREG-08170
U$3-U$6 U$8-U$11 U$14 U$15 U$17 U$18 U$21-U$24 U$27-U$30 U$33-U$36 U$39-U$42 U$45-U$48 = SparkFun-Electromechanical

## Nets
3.3V [vcc]: C1.A C2.1 JP2.10 R1.1 R2.2 R3.1 R6.2 R11.2 U1.16 U2.1 U3.2
3.3V1 [vcc]: C9.A C10.1 JP6.10 R8.2 R9.1 R10.1 R13.2 R15.2 U4.1 U5.16 U6.2
3.3V2 [vcc]: C17.A C18.1 JP10.10 R17.2 R18.1 R19.1 R21.2 R23.2 U7.1 U8.16 U9.2
3.3V3 [vcc]: C25.A C26.1 JP14.10 R25.2 R26.1 R27.1 R29.2 R31.2 U10.1 U11.16 U12.2
3.3V4 [vcc]: C33.A C34.1 JP18.10 R33.2 R34.1 R35.1 R37.2 R39.2 U13.1 U14.16 U15.2
3.3V5 [vcc]: C41.A C42.1 JP22.10 R41.2 R42.1 R43.1 R45.2 R47.2 U16.1 U17.16 U18.2
3.3V6 [vcc]: C49.A C50.1 JP26.10 R49.2 R50.1 R51.1 R53.2 R55.2 U19.1 U20.16 U21.2
3.3V7 [vcc]: C57.A C58.1 JP30.10 R57.2 R58.1 R59.1 R61.2 R63.2 U22.1 U23.16 U24.2
CTS: JP3.9 U1.10 U2.12
CTS1: JP5.9 U4.12 U5.10
CTS2: JP9.9 U7.12 U8.10
CTS3: JP13.9 U10.12 U11.10
CTS4: JP17.9 U13.12 U14.10
CTS5: JP21.9 U16.12 U17.10
CTS6: JP25.9 U19.12 U20.10
CTS7: JP29.9 U22.12 U23.10
DIN: D2.C JP2.8 U1.12 U2.3
DIN1: D7.C JP6.8 U4.3 U5.12
DIN2: D12.C JP10.8 U7.3 U8.12
DIN3: D17.C JP14.8 U10.3 U11.12
DIN4: D22.C JP18.8 U13.3 U14.12
DIN5: D27.C JP22.8 U16.3 U17.12
DIN6: D32.C JP26.8 U19.3 U20.12
DIN7: D37.C JP30.8 U22.3 U23.12
DIO0: JP3.1 U2.20
DIO1: JP3.2 U2.19
DIO2: JP3.3 U2.18
DIO3: JP3.4 U2.17
DIO4: JP3.10 U2.11
DIO5: JP3.6 U2.15
DIO6: JP5.10 U4.11
DIO7: JP5.8 U4.13
DIO8: JP5.6 U4.15
DIO9: JP3.8 U2.13
DIO10: JP5.4 U4.17
DIO11: JP2.4 U2.7
DIO12: JP2.7 U2.4
DIO13: JP5.3 U4.18
DIO14: JP5.2 U4.19
DIO15: JP5.1 U4.20
DIO16: JP6.4 U4.7
DIO17: JP6.7 U4.4
DIO18: JP9.10 U7.11
DIO19: JP9.8 U7.13
DIO20: JP9.6 U7.15
DIO21: JP9.4 U7.17
DIO22: JP9.3 U7.18
DIO23: JP9.2 U7.19
DIO24: JP9.1 U7.20
DIO25: JP10.4 U7.7
DIO26: JP10.7 U7.4
DIO27: JP13.10 U10.11
DIO28: JP13.8 U10.13
DIO29: JP13.6 U10.15
DIO30: JP13.4 U10.17
DIO31: JP13.3 U10.18
DIO32: JP13.2 U10.19
DIO33: JP13.1 U10.20
DIO34: JP14.4 U10.7
DIO35: JP14.7 U10.4
DIO36: JP17.10 U13.11
DIO37: JP17.8 U13.13
DIO38: JP17.6 U13.15
DIO39: JP17.4 U13.17
DIO40: JP17.3 U13.18
DIO41: JP17.2 U13.19
DIO42: JP17.1 U13.20
DIO43: JP18.4 U13.7
DIO44: JP18.7 U13.4
DIO45: JP21.10 U16.11
DIO46: JP21.8 U16.13
DIO47: JP21.6 U16.15
DIO48: JP21.4 U16.17
DIO49: JP21.3 U16.18
DIO50: JP21.2 U16.19
DIO51: JP21.1 U16.20
DIO52: JP22.4 U16.7
DIO53: JP22.7 U16.4
DIO54: JP25.10 U19.11
DIO55: JP25.8 U19.13
DIO56: JP25.6 U19.15
DIO57: JP25.4 U19.17
DIO58: JP25.3 U19.18
DIO59: JP25.2 U19.19
DIO60: JP25.1 U19.20
DIO61: JP26.4 U19.7
DIO62: JP26.7 U19.4
DIO63: JP29.10 U22.11
DIO64: JP29.8 U22.13
DIO65: JP29.6 U22.15
DIO66: JP29.4 U22.17
DIO67: JP29.3 U22.18
DIO68: JP29.2 U22.19
DIO69: JP29.1 U22.20
DIO70: JP30.4 U22.7
DIO71: JP30.7 U22.4
DOUT: D3.C JP2.9 U1.11 U2.2
DOUT1: D8.C JP6.9 U4.2 U5.11
DOUT2: D13.C JP10.9 U7.2 U8.11
DOUT3: D18.C JP14.9 U10.2 U11.11
DOUT4: D23.C JP18.9 U13.2 U14.11
DOUT5: D28.C JP22.9 U16.2 U17.11
DOUT6: D33.C JP26.9 U19.2 U20.11
DOUT7: D38.C JP30.9 U22.2 U23.11
DTR: JP2.2 Q1.3 R2.1 U2.9
DTR1: JP6.2 Q2.3 R13.1 U4.9
DTR2: JP10.2 Q3.3 R21.1 U7.9
DTR3: JP14.2 Q4.3 R29.1 U10.9
DTR4: JP18.2 Q5.3 R37.1 U13.9
DTR5: JP22.2 Q6.3 R45.1 U16.9
DTR6: JP26.2 Q7.3 R53.1 U19.9
DTR7: JP30.2 Q8.3 R61.1 U22.9
GND [vcc]: C1.C C2.2 C4.2 C6.2 C7.C C8.2 D4.C D5.C JP1.5 JP2.1 JP2.11 JP4.GND JP4.GNDBREAK Q1.2 R5.1 S3.3 S3.4 U1.15 U2.10
GND1 [vcc]: C9.C C10.2 C12.2 C14.2 C15.C C16.2 D6.C D9.C JP6.1 JP6.11 JP7.5 JP8.GND JP8.GNDBREAK Q2.2 R14.1 S2.3 S2.4 U4.10 U5.15
GND2 [vcc]: C17.C C18.2 C20.2 C22.2 C23.C C24.2 D11.C D14.C JP10.1 JP10.11 JP11.5 JP12.GND JP12.GNDBREAK Q3.2 R22.1 S5.3 S5.4 U7.10 U8.15
GND3 [vcc]: C25.C C26.2 C28.2 C30.2 C31.C C32.2 D16.C D19.C JP14.1 JP14.11 JP15.5 JP16.GND JP16.GNDBREAK Q4.2 R30.1 S7.3 S7.4 U10.10 U11.15
GND4 [vcc]: C33.C C34.2 C36.2 C38.2 C39.C C40.2 D21.C D24.C JP18.1 JP18.11 JP19.5 JP20.GND JP20.GNDBREAK Q5.2 R38.1 S9.3 S9.4 U13.10 U14.15
GND5 [vcc]: C41.C C42.2 C44.2 C46.2 C47.C C48.2 D26.C D29.C JP22.1 JP22.11 JP23.5 JP24.GND JP24.GNDBREAK Q6.2 R46.1 S11.3 S11.4 U16.10 U17.15
GND6 [vcc]: C49.C C50.2 C52.2 C54.2 C55.C C56.2 D31.C D34.C JP26.1 JP26.11 JP27.5 JP28.GND JP28.GNDBREAK Q7.2 R54.1 S13.3 S13.4 U19.10 U20.15
GND7 [vcc]: C57.C C58.2 C60.2 C62.2 C63.C C64.2 D36.C D39.C JP30.1 JP30.11 JP31.5 JP32.GND JP32.GNDBREAK Q8.2 R62.1 S15.3 S15.4 U22.10 U23.15
N$1: D2.A R1.2
N$2: D4.A R4.1
N$3: C3.1 U1.1
N$4: D3.A R3.2
N$5: C3.2 U1.3
N$6: C5.1 U1.4
N$7: C5.2 U1.5
N$8: C6.1 U1.6
N$9: C4.1 U1.2
N$10: R5.2 R6.1 U3.1
N$11: F1.2 S1.5
N$12: Q1.1 R7.1
N$13: SJ2.2 U1.13
N$14: SJ1.2 U1.14
N$15: D1.A JP4.PWR TP6.P$1
N$16: D1.C F1.1
N$17: D6.A R8.1
N$18: D7.A R9.2
N$19: D8.A R10.2
N$20: D9.A R12.1
N$21: C11.2 U5.3
N$22: C13.1 U5.4
N$23: C13.2 U5.5
N$24: C14.1 U5.6
N$25: C12.1 U5.2
N$26: C11.1 U5.1
N$27: D10.A JP8.PWR TP12.P$1
N$28: D10.C F2.1
N$29: R14.2 R15.1 U6.1
N$30: F2.2 S4.5
N$31: Q2.1 R16.1
N$32: SJ4.2 U5.13
N$33: SJ3.2 U5.14
N$34: D11.A R17.1
N$35: D12.A R18.2
N$36: D13.A R19.2
N$37: D14.A R20.1
N$38: D5.A R11.1
N$39: C19.2 U8.3
N$40: C21.1 U8.4
N$41: C21.2 U8.5
N$42: C22.1 U8.6
N$43: C20.1 U8.2
N$44: C19.1 U8.1
N$45: D15.A JP12.PWR TP18.P$1
N$46: D15.C F3.1
N$47: R22.2 R23.1 U9.1
N$48: F3.2 S6.5
N$49: Q3.1 R24.1
N$50: SJ6.2 U8.13
N$51: SJ5.2 U8.14
N$52: D16.A R25.1
N$53: D17.A R26.2
N$54: D18.A R27.2
N$55: D19.A R28.1
N$56: C27.2 U11.3
N$57: C29.1 U11.4
N$58: C29.2 U11.5
N$59: C30.1 U11.6
N$60: C28.1 U11.2
N$61: C27.1 U11.1
N$62: D20.A JP16.PWR TP24.P$1
N$63: D20.C F4.1
N$64: R30.2 R31.1 U12.1
N$65: F4.2 S8.5
N$66: Q4.1 R32.1
N$67: SJ8.2 U11.13
N$68: SJ7.2 U11.14
N$69: D21.A R33.1
N$70: D22.A R34.2
N$71: D23.A R35.2
N$72: D24.A R36.1
N$73: C35.2 U14.3
N$74: C37.1 U14.4
N$75: C37.2 U14.5
N$76: C38.1 U14.6
N$77: C36.1 U14.2
N$78: C35.1 U14.1
N$79: D25.A JP20.PWR TP30.P$1
N$80: D25.C F5.1
N$81: R38.2 R39.1 U15.1
N$82: F5.2 S10.5
N$83: Q5.1 R40.1
N$84: SJ10.2 U14.13
N$85: SJ9.2 U14.14
N$86: D26.A R41.1
N$87: D27.A R42.2
N$88: D28.A R43.2
N$89: D29.A R44.1
N$90: C43.2 U17.3
N$91: C45.1 U17.4
N$92: C45.2 U17.5
N$93: C46.1 U17.6
N$94: C44.1 U17.2
N$95: C43.1 U17.1
N$96: D30.A JP24.PWR TP36.P$1
N$97: D30.C F6.1
N$98: R46.2 R47.1 U18.1
N$99: F6.2 S12.5
N$100: Q6.1 R48.1
N$101: SJ12.2 U17.13
N$102: SJ11.2 U17.14
N$103: D31.A R49.1
N$104: D32.A R50.2
N$105: D33.A R51.2
N$106: D34.A R52.1
N$107: C51.2 U20.3
N$108: C53.1 U20.4
N$109: C53.2 U20.5
N$110: C54.1 U20.6
N$111: C52.1 U20.2
N$112: C51.1 U20.1
N$113: D35.A JP28.PWR TP42.P$1
N$114: D35.C F7.1
N$115: R54.2 R55.1 U21.1
N$116: F7.2 S14.5
N$117: Q7.1 R56.1
N$118: SJ14.2 U20.13
N$119: SJ13.2 U20.14
N$120: D36.A R57.1
N$121: D37.A R58.2
N$122: D38.A R59.2
N$123: D39.A R60.1
N$124: C59.2 U23.3
N$125: C61.1 U23.4
N$126: C61.2 U23.5
N$127: C62.1 U23.6
N$128: C60.1 U23.2
N$129: C59.1 U23.1
N$130: D40.A JP32.PWR TP48.P$1
N$131: D40.C F8.1
N$132: R62.2 R63.1 U24.1
N$133: F8.2 S16.5
N$134: Q8.1 R64.1
N$135: SJ16.2 U23.13
N$136: SJ15.2 U23.14
RAW [vcc]: C7.A C8.1 JP3.11 S1.6 U3.3
RAW1 [vcc]: C15.A C16.1 JP5.11 S4.6 U6.3
RAW2 [vcc]: C23.A C24.1 JP9.11 S6.6 U9.3
RAW3 [vcc]: C31.A C32.1 JP13.11 S8.6 U12.3
RAW4 [vcc]: C39.A C40.1 JP17.11 S10.6 U15.3
RAW5 [vcc]: C47.A C48.1 JP21.11 S12.6 U18.3
RAW6 [vcc]: C55.A C56.1 JP25.11 S14.6 U21.3
RAW7 [vcc]: C63.A C64.1 JP29.11 S16.6 U24.3
RES1: JP2.3 U2.8
RES2: JP3.7 U2.14
RES3: JP6.3 U4.8
RES4: JP5.7 U4.14
RES5: JP10.3 U7.8
RES6: JP9.7 U7.14
RES7: JP14.3 U10.8
RES8: JP13.7 U10.14
RES9: JP18.3 U13.8
RES10: JP17.7 U13.14
RES11: JP22.3 U16.8
RES12: JP21.7 U16.14
RES13: JP26.3 U19.8
RES14: JP25.7 U19.14
RES15: JP30.3 U22.8
RES16: JP29.7 U22.14
RESET: JP2.6 S3.1 S3.2 U2.5
RESET1: JP6.6 S2.1 S2.2 U4.5
RESET2: JP10.6 S5.1 S5.2 U7.5
RESET3: JP14.6 S7.1 S7.2 U10.5
RESET4: JP18.6 S9.1 S9.2 U13.5
RESET5: JP22.6 S11.1 S11.2 U16.5
RESET6: JP26.6 S13.1 S13.2 U19.5
RESET7: JP30.6 S15.1 S15.2 U22.5
RS232-CTS: JP1.8 TP2.P$1 U1.7
RS232-CTS1: JP7.8 TP8.P$1 U5.7
RS232-CTS2: JP11.8 TP14.P$1 U8.7
RS232-CTS3: JP15.8 TP20.P$1 U11.7
RS232-CTS4: JP19.8 TP26.P$1 U14.7
RS232-CTS5: JP23.8 TP32.P$1 U17.7
RS232-CTS6: JP27.8 TP38.P$1 U20.7
RS232-CTS7: JP31.8 TP44.P$1 U23.7
RS232-DTR: JP1.4 R7.2 TP3.P$1
RS232-DTR1: JP7.4 R16.2 TP9.P$1
RS232-DTR2: JP11.4 R24.2 TP15.P$1
RS232-DTR3: JP15.4 R32.2 TP21.P$1
RS232-DTR4: JP19.4 R40.2 TP27.P$1
RS232-DTR5: JP23.4 R48.2 TP33.P$1
RS232-DTR6: JP27.4 R56.2 TP39.P$1
RS232-DTR7: JP31.4 R64.2 TP45.P$1
RS232-RTS: JP1.7 TP1.P$1 U1.8
RS232-RTS1: JP7.7 TP7.P$1 U5.8
RS232-RTS2: JP11.7 TP13.P$1 U8.8
RS232-RTS3: JP15.7 TP19.P$1 U11.8
RS232-RTS4: JP19.7 TP25.P$1 U14.8
RS232-RTS5: JP23.7 TP31.P$1 U17.8
RS232-RTS6: JP27.7 TP37.P$1 U20.8
RS232-RTS7: JP31.7 TP43.P$1 U23.8
RS232-RX: JP1.3 SJ1.1 SJ2.3 TP4.P$1
RS232-RX1: JP7.3 SJ3.1 SJ4.3 TP10.P$1
RS232-RX2: JP11.3 SJ5.1 SJ6.3 TP16.P$1
RS232-RX3: JP15.3 SJ7.1 SJ8.3 TP22.P$1
RS232-RX4: JP19.3 SJ9.1 SJ10.3 TP28.P$1
RS232-RX5: JP23.3 SJ11.1 SJ12.3 TP34.P$1
RS232-RX6: JP27.3 SJ13.1 SJ14.3 TP40.P$1
RS232-RX7: JP31.3 SJ15.1 SJ16.3 TP46.P$1
RS232-TX: JP1.2 SJ1.3 SJ2.1 TP5.P$1
RS232-TX1: JP7.2 SJ3.3 SJ4.1 TP11.P$1
RS232-TX2: JP11.2 SJ5.3 SJ6.1 TP17.P$1
RS232-TX3: JP15.2 SJ7.3 SJ8.1 TP23.P$1
RS232-TX4: JP19.2 SJ9.3 SJ10.1 TP29.P$1
RS232-TX5: JP23.2 SJ11.3 SJ12.1 TP35.P$1
RS232-TX6: JP27.2 SJ13.3 SJ14.1 TP41.P$1
RS232-TX7: JP31.2 SJ15.3 SJ16.1 TP47.P$1
RSSI: JP2.5 R4.2 U2.6
RSSI1: JP6.5 R12.2 U4.6
RSSI2: JP10.5 R20.2 U7.6
RSSI3: JP14.5 R28.2 U10.6
RSSI4: JP18.5 R36.2 U13.6
RSSI5: JP22.5 R44.2 U16.6
RSSI6: JP26.5 R52.2 U19.6
RSSI7: JP30.5 R60.2 U22.6
RTS: JP3.5 U1.9 U2.16
RTS1: JP5.5 U4.16 U5.9
RTS2: JP9.5 U7.16 U8.9
RTS3: JP13.5 U10.16 U11.9
RTS4: JP17.5 U13.16 U14.9
RTS5: JP21.5 U16.16 U17.9
RTS6: JP25.5 U19.16 U20.9
RTS7: JP29.5 U22.16 U23.9